# EAGLE board plugin (EAGLE 9.2.0)
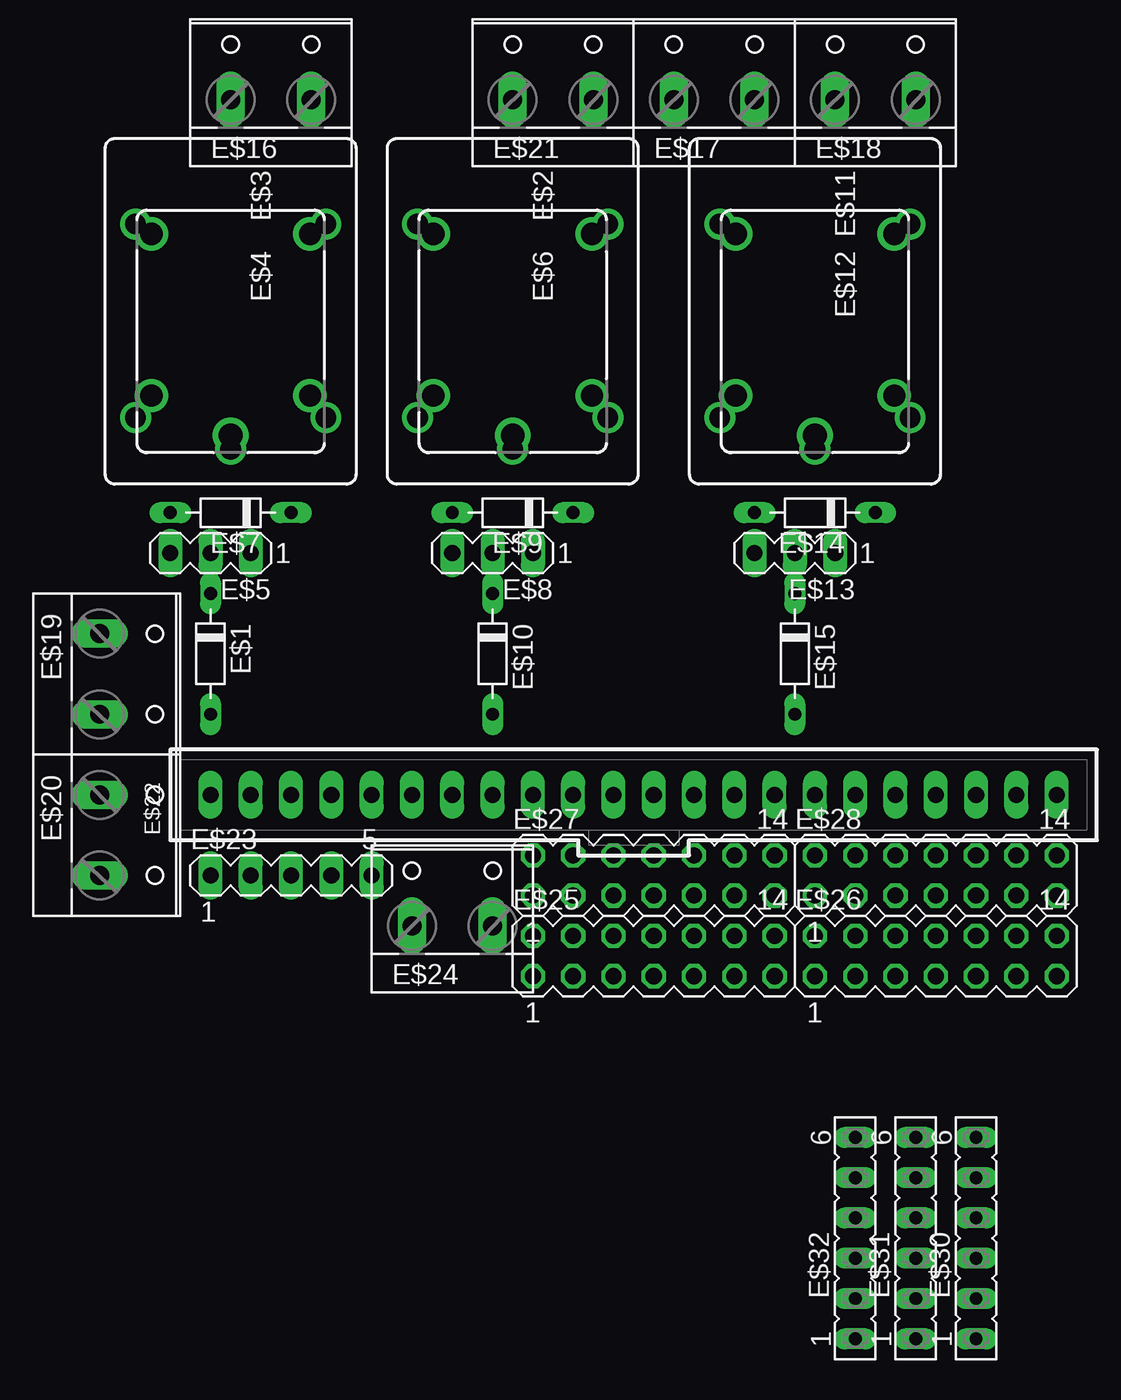
[diagram p0: board, top side]
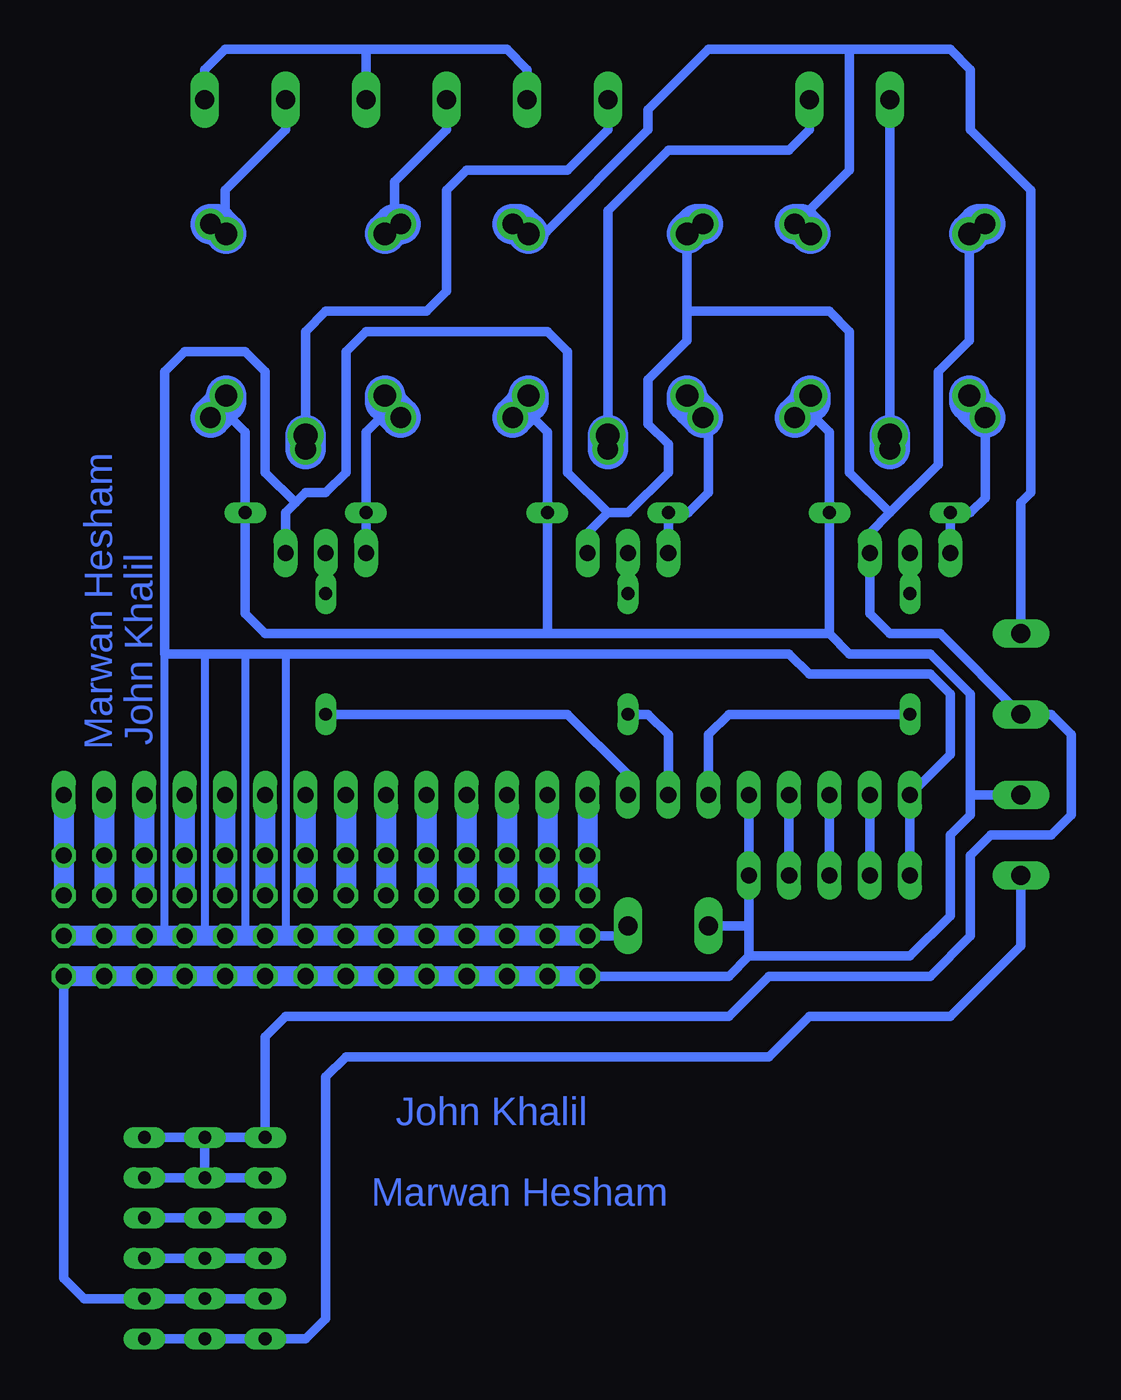
[diagram p1: board, bottom side, seen from below]

No outline drawn. Coordinates in mm, seen from the top.
Copper layers (1*16): Top 0.035mm / dielectric 1.5mm / Bottom 0.035mm
Design rules "default": minimum track width 6mil, minimum drill 0.35mm, track to track 6mil, track to pad 6mil, pad to pad 6mil, via to via 6mil, smd to smd 6mil, copper to edge 40mil, drill to drill 6mil, minimum pad ring 10mil, minimum via ring 8mil, stop-mask expansion 4mil, vias tented up to drill 0mil, thermal gap 10mil

## Footprints (pad centres in the part's own frame; a part is rotated, then mirrored left to right if it is on the bottom)
D-7.5 = drill 0.813 long: A 3.81,0; C -3.81,0
JS-M = drill 1.3: 1 6.7,6; 2 6.7,-6; C 8.7,0; NC -5.5,-6; NO -5.5,6
JJM1C = drill 1.4: 1 4.05,5; 2 4.05,-5; NC -6.15,-5; NO -6.15,5 | drill 1.5: C 6.55,0
MA03-1 = drill 1.016 long: 1 -2.54,0; 2 0,0; 3 2.54,0
W237-132 = drill 1.194 long: 1 -2.54,-0.635; 2 2.54,-0.635
70543-22 = drill 1.016 long: 1 -26.67,0; 2 -24.13,0; 3 -21.59,0; 4 -19.05,0; 5 -16.51,0; 6 -13.97,0; 7 -11.43,0; 8 -8.89,0; 9 -6.35,0; 10 -3.81,0; 11 -1.27,0; 12 1.27,0; 13 3.81,0; 14 6.35,0; 15 8.89,0; 16 11.43,0; 17 13.97,0; 18 16.51,0; 19 19.05,0; 20 21.59,0; 21 24.13,0; 22 26.67,0
MA05-1 = drill 1.016 long: 1 -5.08,0; 2 -2.54,0; 3 0,0; 4 2.54,0; 5 5.08,0
MA07-2 = drill 1.016 octagon: 1 -7.62,-1.27; 2 -7.62,1.27; 3 -5.08,-1.27; 4 -5.08,1.27; 5 -2.54,-1.27; 6 -2.54,1.27; 7 0,-1.27; 8 0,1.27; 9 2.54,-1.27; 10 2.54,1.27; 11 5.08,-1.27; 12 5.08,1.27; 13 7.62,-1.27; 14 7.62,1.27
FE06 = drill 0.813 long: 1 -6.35,0; 2 -3.81,0; 3 -1.27,0; 4 1.27,0; 5 3.81,0; 6 6.35,0

## Placement (x,y rotation side)
E$1  [D-7.5]  17.78,5.08 270 top
E$2  [JS-M]  36.83,26.67 270 top
E$3  [JS-M]  19.05,26.67 270 top
E$4  [JJM1C]  19.05,25.4 270 top
E$5  [MA03-1]  17.78,11.43 180 top
E$6  [JJM1C]  36.83,25.4 270 top
E$7  [D-7.5]  19.05,13.97 180 top
E$8  [MA03-1]  35.56,11.43 180 top
E$9  [D-7.5]  36.83,13.97 180 top
E$10  [D-7.5]  35.56,5.08 270 top
E$11  [JS-M]  55.88,26.67 270 top
E$12  [JJM1C]  55.88,25.4 270 top
E$13  [MA03-1]  54.61,11.43 180 top
E$14  [D-7.5]  55.88,13.97 180 top
E$15  [D-7.5]  54.61,5.08 270 top
E$16  [W237-132]  21.59,40.64 0 top
E$17  [W237-132]  49.53,40.64 0 top
E$18  [W237-132]  59.69,40.64 0 top
E$19  [W237-132]  11.43,3.81 270 top
E$20  [W237-132]  11.43,-6.35 270 top
E$21  [W237-132]  39.37,40.64 0 top
E$22  [70543-22]  44.45,-3.81 0 top
E$23  [MA05-1]  22.86,-8.89 0 top
E$24  [W237-132]  33.02,-11.43 0 top
E$25  [MA07-2]  45.72,-13.97 0 top
E$26  [MA07-2]  63.5,-13.97 0 top
E$27  [MA07-2]  45.72,-8.89 0 top
E$28  [MA07-2]  63.5,-8.89 0 top
E$30  [FE06]  66.04,-31.75 90 top
E$31  [FE06]  62.23,-31.75 90 top
E$32  [FE06]  58.42,-31.75 90 top

## Library data of the parts
E$1 E$7 E$9 E$10 E$14 E$15 = diode
E$2-E$4 E$6 E$11 E$12 = relay
E$5 E$8 E$13 E$23 E$25-E$28 = con-lstb
E$16-E$21 E$24 = con-wago-508
E$22 = con-molex
E$30-E$32 = con-lsta

## Nets
S$1: E$3.C E$4.C E$16.1
S$2: E$2.1 E$3.1 E$4.1 E$6.1 E$7.C E$9.C E$11.1 E$12.1 E$14.C E$20.1 E$22.5 E$23.5 E$24.1 E$25.1 E$25.3 E$25.5 E$25.7 E$25.9 E$25.11 E$25.13 E$26.1 E$26.3 E$26.5 E$26.7 E$26.9 E$26.11 E$26.13 E$30.2 E$31.2 E$32.2
S$4: E$3.2 E$4.2 E$5.3 E$7.A
S$6: E$2.NO E$3.NO E$4.NO E$6.NO E$19.1
S$7: E$1.C E$5.2
S$8: E$2.C E$6.C E$16.2
S$9: E$22.9 E$27.1 E$27.2
S$10: E$2.2 E$6.2 E$8.3 E$9.A
S$11: E$22.10 E$27.3 E$27.4
S$12: E$17.2 E$18.2 E$21.2
S$13: E$8.2 E$10.C
S$14: E$11.C E$12.C E$21.1
S$15: E$22.11 E$27.5 E$27.6
S$16: E$11.2 E$12.2 E$13.3 E$14.A
S$17: E$22.12 E$27.7 E$27.8
S$18: E$11.NO E$12.NO E$18.1
S$19: E$13.2 E$15.C
S$20: E$22.13 E$27.9 E$27.10
S$21: E$22.14 E$27.11 E$27.12
S$22: E$22.15 E$27.13 E$27.14
S$23: E$22.16 E$28.1 E$28.2
S$24: E$22.17 E$28.3 E$28.4
S$25: E$22.18 E$28.5 E$28.6
S$26: E$22.19 E$28.7 E$28.8
S$27: E$22.20 E$28.9 E$28.10
S$28: E$22.21 E$28.11 E$28.12
S$29: E$22.22 E$28.13 E$28.14
S$30: E$1.A E$22.6
S$31: E$10.A E$22.7
S$32: E$15.A E$22.8
S$33: E$22.2 E$23.2
S$34: E$22.3 E$23.3
S$35: E$22.4 E$23.4
S$36: E$2.NC E$3.NC E$4.NC E$5.1 E$6.NC E$8.1 E$13.1 E$19.2 E$22.1 E$23.1 E$24.2 E$25.2 E$25.4 E$25.6 E$25.8 E$25.10 E$25.12 E$25.14 E$26.2 E$26.4 E$26.6 E$26.8 E$26.10 E$26.12 E$26.14 E$30.5 E$30.6 E$31.5 E$31.6 E$32.5 E$32.6
S$38: E$11.NC E$12.NC E$17.1
S$40: E$30.4 E$31.4 E$32.4
S$41: E$30.3 E$31.3 E$32.3
S$43: E$20.2 E$30.1 E$31.1 E$32.1

## Tracks (layer width: path | path; a pad name or v marks a point on that pad's centre or on a via)
S$1
  Bottom 0.61: E$16.1 E$4.C
  Bottom 2.54: E$4.C E$3.C
S$2
  Bottom 0.61: 24.41,20.61 22.86,19.05 E$7.C 22.86,6.35 | 42.2,20.61 40.64,19.05 E$9.C 40.64,6.35 | 61.24,20.61 59.69,19.05 E$14.C 59.69,7.62 58.42,6.35 40.64,6.35 | 22.86,6.35 40.64,6.35 | 22.86,6.35 21.59,5.08 16.51,5.08 13.97,2.54 13.97,-3.81 | E$22.5 E$23.5 27.94,-12.06 | 27.94,-13.97 29.21,-15.24 E$25.1 | 27.94,-13.97 27.94,-12.06 | E$24.1 27.94,-12.06 | E$20.1 13.97,-3.81 | 27.94,-13.97 17.78,-13.97 15.24,-11.43 15.24,-6.35 13.97,-5.08 13.97,-3.81 | E$32.2 E$31.2 E$30.2 69.85,-35.56 71.12,-34.29 E$26.13
  Bottom 1.016: 24.41,20.61 24.05,20.97 | 42.2,20.61 41.83,20.97 | 61.24,20.61 60.88,20.97
  Bottom 1.27: E$26.13 E$26.11 E$26.9 E$26.7 E$26.5 E$26.3 E$26.1 E$25.13 E$25.11 E$25.9 E$25.7 E$25.5 E$25.3 E$25.1
  Bottom 2.54: E$3.1 24.41,20.61 | 24.05,20.97 E$4.1 | E$2.1 42.2,20.61 | 41.83,20.97 E$6.1 | E$11.1 61.24,20.61 | 60.88,20.97 E$12.1
S$4
  Bottom 0.61: E$5.3 E$7.A 13.97,13.97 13.05,14.89 E$3.2
  Bottom 1.27: 13.69,20.61 14.05,20.97
  Bottom 2.54: E$3.2 13.69,20.61 | 14.05,20.97 E$4.2
S$6
  Bottom 0.61: E$4.NO 24.05,33.1 21.59,35.56 21.59,43.18 | 21.59,43.18 30.48,43.18 34.29,39.37 34.29,38.1 40.7,31.69 41.97,31.69 | E$19.1 10.79,14.61 10.16,15.24 10.16,34.29 13.97,38.1 13.97,41.91 15.24,43.18 21.59,43.18
  Bottom 2.54: E$3.NO 24.67,32.17 E$4.NO | E$2.NO 42.45,32.17 41.97,31.69 E$6.NO
S$7
  Bottom 0.61: E$5.2 E$1.C
S$8
  Bottom 0.61: E$16.2 24.13,38.1 25.4,36.83 33.02,36.83 36.83,33.02 E$6.C
  Bottom 2.54: E$6.C E$2.C
S$9
  Bottom 1.27: E$22.9 E$27.2 E$27.1
S$10
  Bottom 0.61: E$8.3 E$9.A 31.75,13.97 30.48,15.24 30.48,19.62 E$2.2
  Bottom 1.27: 31.46,20.61 31.83,20.97
  Bottom 2.54: E$2.2 31.46,20.61 | 31.83,20.97 E$6.2
S$11
  Bottom 1.27: E$22.10 E$27.4 E$27.3
S$12
  Bottom 0.61: E$21.2 41.91,41.91 43.18,43.18 52.07,43.18 | 52.07,43.18 60.96,43.18 62.23,41.91 E$18.2 | E$17.2 52.07,43.18
S$13
  Bottom 0.61: E$8.2 E$10.C
S$14
  Bottom 0.61: E$21.1 36.83,38.1 39.37,35.56 45.72,35.56 46.99,34.29 46.99,27.94 48.26,26.67 54.61,26.67 55.88,25.4 E$12.C
  Bottom 2.54: E$12.C E$11.C
S$15
  Bottom 1.27: E$22.11 E$27.6 E$27.5
S$16
  Bottom 0.61: 50.52,20.61 52.07,19.05 E$14.A E$13.3
  Bottom 1.27: 50.52,20.61 50.88,20.97
  Bottom 2.54: E$11.2 50.52,20.61 | 50.88,20.97 E$12.2
S$17
  Bottom 1.27: E$22.12 E$27.8 E$27.7
S$18
  Bottom 0.61: 60.54,32.17 60.96,32.17 | 60.96,32.17 61.5,32.17 | E$18.1 57.15,38.1 60.96,34.29 60.96,32.17
  Bottom 2.54: E$11.NO 61.5,32.17 E$12.NO
S$19
  Bottom 0.61: E$13.2 E$15.C
S$20
  Bottom 1.27: E$22.13 E$27.10 E$27.9
S$21
  Bottom 1.27: E$22.14 E$27.12 E$27.11
S$22
  Bottom 1.27: E$22.15 E$27.14 E$27.13
S$23
  Bottom 1.27: E$22.16 E$28.2 E$28.1
S$24
  Bottom 1.27: E$22.17 E$28.4 E$28.3
S$25
  Bottom 1.27: E$22.18 E$28.6 E$28.5
S$26
  Bottom 1.27: E$22.19 E$28.8 E$28.7
S$27
  Bottom 1.27: E$22.20 E$28.10 E$28.9
S$28
  Bottom 1.27: E$22.21 E$28.12 E$28.11
S$29
  Bottom 1.27: E$22.22 E$28.14 E$28.13
S$30
  Bottom 0.61: E$1.A 29.21,1.27 30.48,0 E$22.6
S$31
  Bottom 0.61: E$22.7 33.02,0 34.29,1.27 E$10.A
S$32
  Bottom 0.61: E$22.8 35.56,-2.54 39.37,1.27 E$15.A
S$33
  Bottom 0.61: E$23.2 E$22.2
S$34
  Bottom 0.61: E$23.3 E$22.3
S$35
  Bottom 0.61: E$23.4 E$22.4
S$36
  Bottom 0.508: 57.15,5.08 57.15,-12.7 | 59.69,5.08 59.69,-12.7 | 62.23,5.08 62.23,-12.7 | 64.77,-12.7 64.77,5.08
  Bottom 0.61: E$4.NC 14.05,24.81 16,22.86 16,17.02 19.05,13.97 | 19.05,13.97 20.32,12.7 E$5.1 20.32,7.62 19.05,6.35 15.88,6.35 E$19.2 8.89,1.27 7.62,0 7.62,-5.08 8.89,-6.35 12.7,-6.35 13.97,-7.62 13.97,-12.7 16.51,-15.24 26.67,-15.24 29.21,-17.78 57.15,-17.78 58.42,-19.05 E$32.6 E$31.6 | E$8.1 38.1,12.7 36.83,13.97 | 31.83,26.67 31.83,24.81 34.29,22.35 34.29,19.56 33.02,18.29 33.02,16.51 35.56,13.97 36.83,13.97 | 31.83,26.67 E$6.NC | 19.05,13.97 21.59,16.51 21.59,25.4 22.86,26.67 31.83,26.67 | 56.52,14.61 55.88,15.24 54.61,15.24 53.34,16.51 53.34,24.13 52.07,25.4 40.64,25.4 39.37,24.13 39.37,16.51 36.83,13.97 | 56.52,14.61 57.15,13.97 E$13.1 | 56.52,14.61 58.42,16.51 58.42,22.86 59.69,24.13 63.5,24.13 64.77,22.86 64.77,5.08 62.23,5.08 59.69,5.08 57.15,5.08 25.4,5.08 24.13,3.81 16.51,3.81 15.24,2.54 15.24,-1.27 E$22.1 E$23.1 | E$24.2 35.56,-12.7 E$25.2 | E$31.5 E$32.5 | E$30.5 E$31.5 | E$30.6 E$31.6 | E$31.6 E$31.5
  Bottom 1.27: E$25.2 E$25.4 E$25.6 E$25.8 E$25.10 E$25.12 E$25.14 E$26.2 57.15,-12.7 E$26.4 59.69,-12.7 E$26.6 62.23,-12.7 E$26.8 64.77,-12.7 E$26.10 E$26.12 E$26.14
  Bottom 2.54: E$3.NC 13.43,32.17 E$4.NC | E$2.NC 31.21,32.17 E$6.NC
S$38
  Bottom 0.61: E$17.1 46.99,38.1 50.26,34.83 50.26,32.17
  Bottom 2.54: E$12.NC 50.26,32.17 E$11.NC
S$40
  Bottom 0.61: E$32.4 E$31.4 E$30.4
S$41
  Bottom 0.61: E$32.3 E$31.3 E$30.3
S$43
  Bottom 0.61: E$31.1 E$32.1 55.88,-38.1 54.61,-36.83 54.61,-21.59 53.34,-20.32 26.67,-20.32 24.13,-17.78 15.24,-17.78 10.79,-13.34 E$20.2 | 63.5,-38.1 E$31.1 | E$30.1 E$31.1

## Text on the board
Bottom: Marwan Hesham | John Khalil | John Khalil | Marwan Hesham